# Allegro board usm-r1_20170105.brd
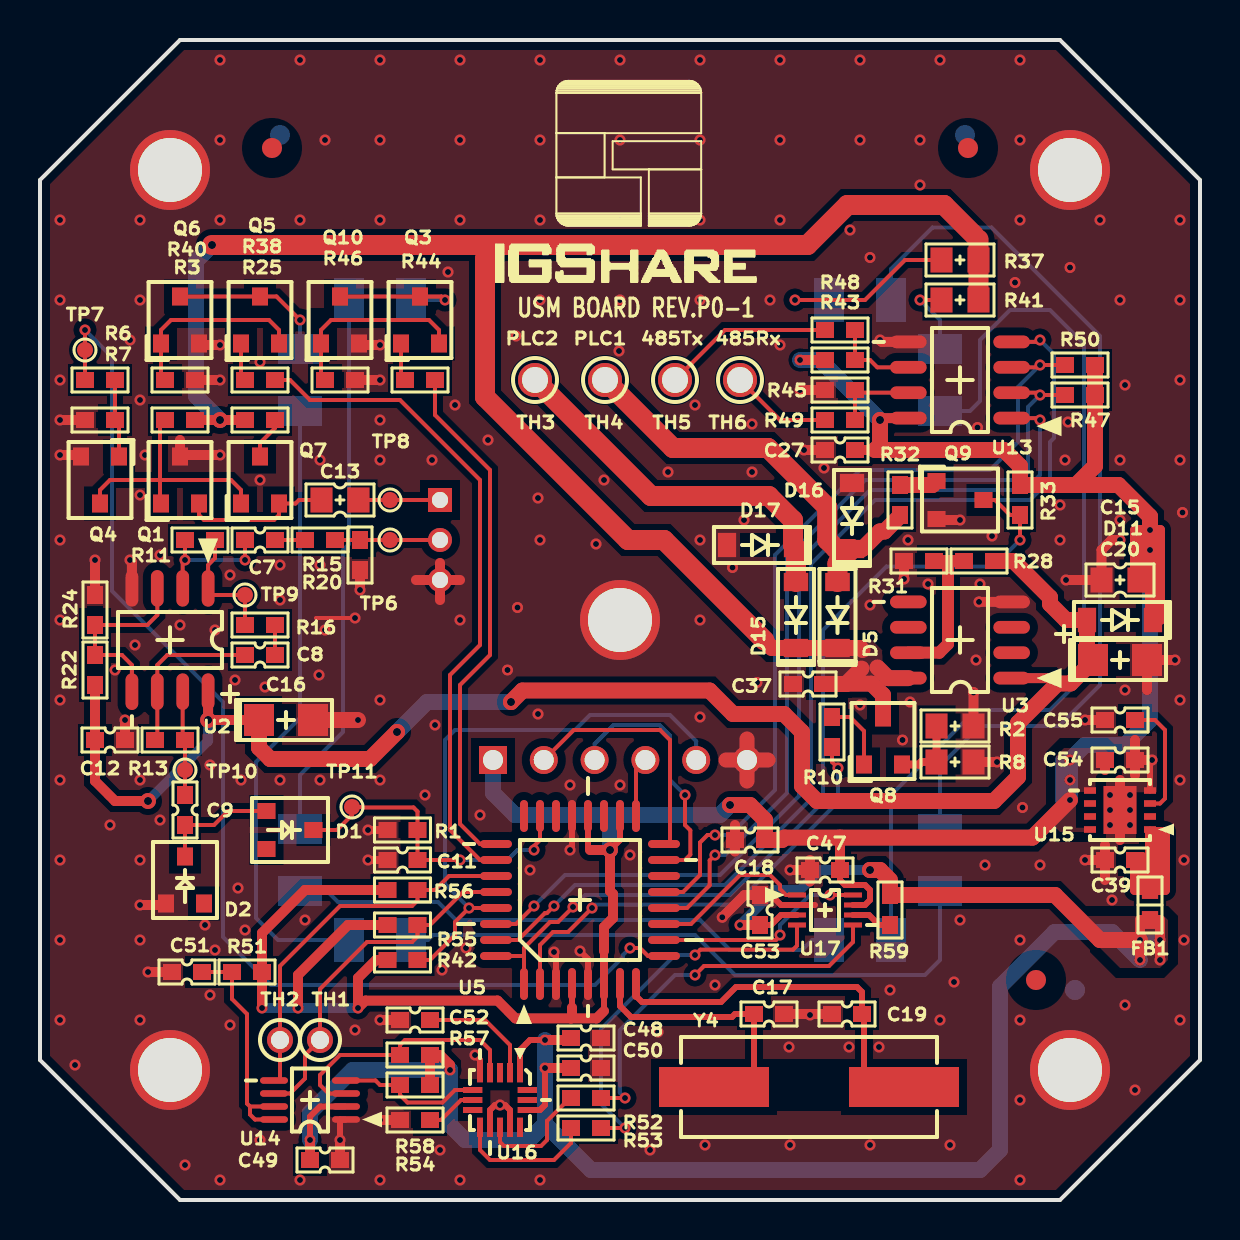
[diagram p0: board, top side]
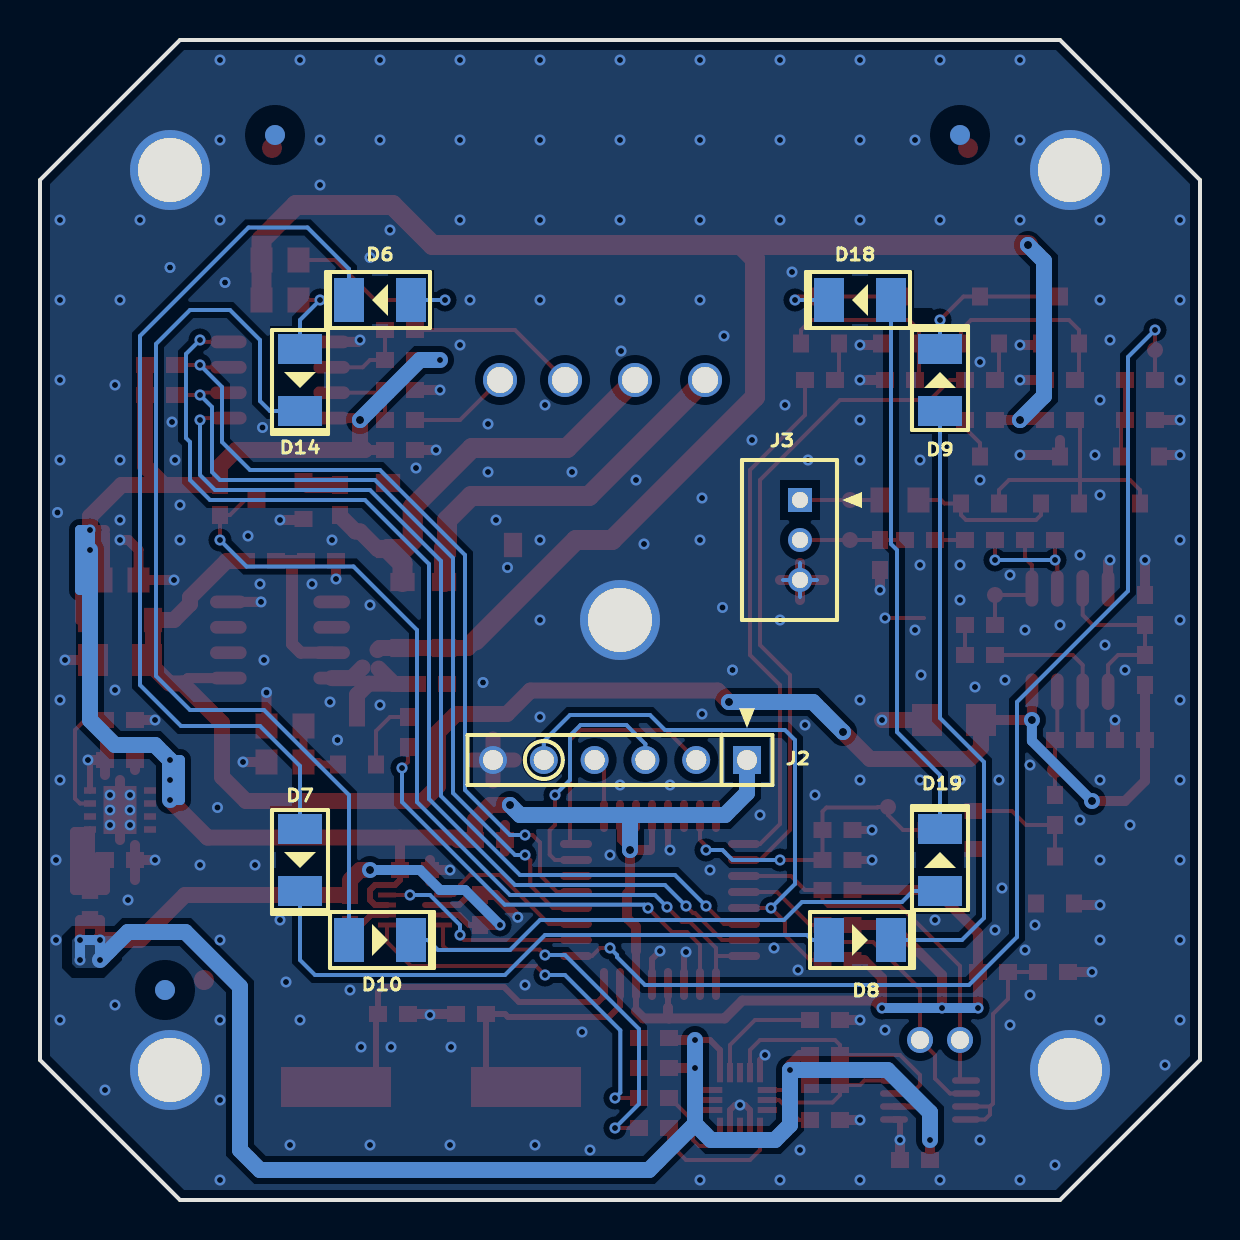
[diagram p1: board, bottom side, seen from below]

Outline 58 x 58 mm; copper layers: TOP, BOTTOM. Coordinates in mm from the lower left corner of the outline.
Outline path: 0,51 7,58 51,58 58,51 58,7 51,0 7,0 0,7 0,51

## Placement (name value [footprint] x y rotation side)
C7  -  [CC1608]  11 33 0 top
C8  -  [CC1608]  11 27.25 0 top
C9  -  [CC1608]  7.25 19.5 90 top
C11  -  [CC1608]  18.12 17 0 top
C12  -  [CC1608]  3.5 23 180 top
C13  -  [CC2012]  15 35 180 top
C15  -  [CC2012]  54 31 0 top
C16  -  [TC3216]  12.3 24 0 top
C17  -  [CC1608]  36.45 9.3 0 top
C18  -  [CC1608]  35.5 18 0 top
C19  -  [CC1608]  40.35 9.3 180 top
C20  -  [TC3216]  54 27 0 top
C27  -  [CC1608]  40 37.5 0 top
C37  -  [CC1608]  38.4 25.8 0 top
C39  -  [CC1608]  54 17 180 top
C47  -  [CC1608]  39.25 16.5 180 top
C48  -  [CC1608]  27.3 8.1 0 top
C49  -  [CC1608]  14.25 2 0 top
C50  -  [CC1608]  27.3 6.6 0 top
C51  -  [CC1608]  7.35 11.4 180 top
C52  -  [CC1608]  18.75 9 180 top
C53  -  [CC1608]  36 14.5 90 top
C54  -  [CC1608]  54 22 0 top
C55  -  [CC1608]  54 24 180 top
D1  -  [BAT54]  12.5 18.5 270 top
D2  -  [BAT54]  7.25 16 0 top
D5  -  [SOD-123]  39.88 29.25 270 top
D6  -  [JSL-3528]  41 45 0 bottom
D7  -  [JSL-3528]  45 17 270 bottom
D8  -  [JSL-3528]  17 13 180 bottom
D9  -  [JSL-3528]  13 41 90 bottom
D10  -  [JSL-3528]  41 13 180 bottom
D11  -  [SOD-123]  54 29 0 top
D14  -  [JSL-3528]  45 41 270 bottom
D15  -  [SOD-123]  37.8 29.25 270 top
D16  -  [SOD-123]  40.6 34.2 270 top
D17  -  [SOD-123]  36 32.75 0 top
D18  -  [JSL-3528]  17 45 0 bottom
D19  -  [JSL-3528]  13 17 90 bottom
FB1  -  [BEAD1608]  55.5 14.75 270 top
H1  -  [HOLE3_2]  6.5 51.5 0 top
H2  -  [HOLE3_2]  51.5 51.5 0 top
H3  -  [HOLE3_2]  6.5 6.5 0 top
H4  -  [HOLE3_2]  51.5 6.5 0 top
H5  -  [HOLE3_2]  29 29 0 top
J2  -  [HEADER6_2_5MM_S]  29 22 0 bottom
J3  -  [A2001-WV03]  20 33 90 bottom
NOREF  -  []  0 7 0 top
NOREF#2  -  []  7 0 90 top
NOREF#3  -  []  70.4 -15.8 0 top
NOREF#4  -  []  79 7.8 0 top
NOREF#5  -  [unnamed#2]  49.8 11 0 top
NOREF#6  -  [unnamed#2]  46.4 52.6 0 top
NOREF#7  -  []  0 0 0 top
NOREF#8  -  [unnamed#2]  11.6 52.6 0 top
NOREF#9  -  [unnamed#2]  12 53.25 180 bottom
NOREF#10  -  [unnamed#2]  51.75 10.5 180 bottom
NOREF#11  -  [unnamed#2]  46.25 53.25 180 bottom
Q1  -  [SOT23]  7 36 0 top
Q3  -  [SOT23]  19 44 0 top
Q4  -  [SOT23]  3 36 180 top
Q5  -  [SOT23]  11 44 0 top
Q6  -  [SOT23]  7 44 0 top
Q7  -  [SOT23]  11 36 0 top
Q8  -  [SOT23]  42.15 22.95 0 top
Q9  -  [SOT23]  46 35 270 top
Q10  -  [SOT23]  15 44 0 top
R1  -  [RC1608]  18.12 18.5 0 top
R2  -  [RC2012]  45.75 23.7 180 top
R3  -  [RC1608]  7 39 0 top
R6  -  [RC1608]  3 41 0 top
R7  -  [RC1608]  3 39 0 top
R8  -  [RC2012]  45.75 21.9 180 top
R10  -  [RC1608]  39.6 23.4 270 top
R11  -  [RC1608]  8 33 0 top
R13  -  [RC1608]  6.5 23 0 top
R15  -  [RC1608]  14 33 180 top
R16  -  [RC1608]  11 28.75 0 top
R20  -  [RC1608]  16 32.25 90 top
R22  -  [RC1608]  2.75 26.5 90 top
R24  -  [RC1608]  2.75 29.5 270 top
R25  -  [RC1608]  11 39 180 top
R28  -  [RC1608]  46.95 31.95 0 top
R31  -  [RC1608]  43.95 31.95 0 top
R32  -  [RC1608]  43 35 90 top
R33  -  [RC1608]  49 35 90 top
R37  -  [RC2012]  46 47 0 top
R38  -  [RC1608]  11 41 180 top
R40  -  [RC1608]  7 41 180 top
R41  -  [RC2012]  46 45 0 top
R42  -  [RC1608]  18.12 12 180 top
R43  -  [RC1608]  40 42 180 top
R44  -  [RC1608]  19 41 180 top
R45  -  [RC1608]  40 40.5 0 top
R46  -  [RC1608]  15 41 180 top
R47  -  [RC1608]  52 40.25 0 top
R48  -  [RC1608]  40 43.5 0 top
R49  -  [RC1608]  40 39 0 top
R50  -  [RC1608]  52 41.75 0 top
R51  -  [RC1608]  10.35 11.4 0 top
R52  -  [RC1608]  27.3 5.1 180 top
R53  -  [RC1608]  27.3 3.6 180 top
R54  -  [RC1608]  18.75 4 0 top
R55  -  [RC1608]  18.12 13.75 180 top
R56  -  [RC1608]  18.12 15.5 180 top
R57  -  [RC1608]  18.75 7.25 0 top
R58  -  [RC1608]  18.75 5.75 0 top
R59  -  [RC1608]  42.5 14.5 90 top
TH1  -  [1PIN-HDR]  14 8 0 top
TH2  -  [1PIN-HDR]  12 8 0 top
TH3  -  [TP1_3]  24.75 41 0 top
TH4  -  [TP1_3]  28.25 41 0 top
TH5  -  [TP1_3]  31.75 41 0 top
TH6  -  [TP1_3]  35 41 0 top
TP6  -  [TP]  17.5 33 0 top
TP7  -  [TP]  2.25 42.5 0 top
TP8  -  [TP]  17.5 35 0 top
TP9  -  [TP]  10.25 30.25 0 top
TP10  -  [TP]  7.25 21.5 0 top
TP11  -  [TP]  15.6 19.65 0 top
U2  -  [SOP8_3_9_6_1_27]  6.5 28 180 top
U3  -  [SOP8_3_9_6_1_27]  46 28 90 top
U5  -  [QFP32_7_9_0_8]  27 15 90 top
U13  -  [SOP8_3_9_6_1_27]  46 41 90 top
U14  -  [TSSOP8_2_8_4_0_65]  13.5 5 90 top
U15  -  [QFN8_3_0_65]  54 19.5 90 top
U16  -  [QFN16_3_0_5]  23 5 270 top
U17  -  [TSSOP8_2_3_3_1_0_5]  39.25 14.5 270 top
Y4  -  [SX-1]  38.45 5.65 0 top

## Library data of the parts
C7 = 200PF: alternate symbols: (B:CC1608_ALT)
C8 = 680PF: alternate symbols: (B:CC1608_ALT)
C9 = 1NF: alternate symbols: (B:CC1608_ALT)
C11 = 560PF: alternate symbols: (B:CC1608_ALT)
C12 C18 C27 C47-C49 C52-C55 = 100NF: alternate symbols: (B:CC1608_ALT)
C13 = 47NF: alternate symbols: (B:CC2012_ALT)
C15 C39 C51 = 2_2UF: alternate symbols: (B:CC2012_ALT;B:CC1608_ALT)
C16 C20 = TCSCS1C685MAAR: alternate symbols: (B:TC3216_ALT)
C17 C19 = 15PF: alternate symbols: (B:CC1608_ALT)
C37 = 680NF: alternate symbols: (B:CC1608_ALT)
C50 = 4_7UF: alternate symbols: (B:CC1608_ALT)
D1 D2 = BAT54: alternate symbols: (B:BAT54_ALT)
D5 D11 D15-D17 = MMSD4148T1G: alternate symbols: (B:SOD-123_ALT)
D6-D9 = JSL_3528URC: alternate symbols: (B:JSL-3528_ALT)
D10 D14 D18 D19 = JSL_3528PGC: alternate symbols: (B:JSL-3528_ALT)
FB1 = BLM18HE152SN1: alternate symbols: (B:BEAD1608_ALT)
H1-H5 = PCB_HOLE: alternate symbols: (B:HOLE3_2_ALT)
J2 = PH01_2_54_-SS40P-11_5MM: alternate symbols: (B:HEADER6_2_5MM_S_ALT)
J3 = A2001-WV03: alternate symbols: (B:A2001-WV03_ALT)
Q1 = MMBT3906: alternate symbols: (B:SOT23_ALT)
Q3-Q7 Q9 Q10 = MMBT3904: alternate symbols: (B:SOT23_ALT)
Q8 = ZXTN04120HF_SOT23F: alternate symbols: (B:SOT23_ALT)
R1 = 510K: alternate symbols: (B:RC1608_ALT)
R2 R8 = 15: alternate symbols: (B:RC2012_ALT)
R3 R33 = 47K: alternate symbols: (B:RC1608_ALT)
R6 R7 R15 R16 R22 R24 R42 = 10K: alternate symbols: (B:RC1608_ALT)
R10 = 1K: alternate symbols: (B:RC1608_ALT)
R11 R13 = 1M: alternate symbols: (B:RC1608_ALT)
R20 = 3_9K: alternate symbols: (B:RC1608_ALT)
R25 = 200: alternate symbols: (B:RC1608_ALT)
R28 = 360K: alternate symbols: (B:RC1608_ALT)
R31 R32 = 100K: alternate symbols: (B:RC1608_ALT)
R37 R41 = 3_3K: alternate symbols: (B:RC2012_ALT)
R38 R44 = 2_7K: alternate symbols: (B:RC1608_ALT)
R40 R46 = 3K: alternate symbols: (B:RC1608_ALT)
R43 R45 R47 R50 R54-R59 = 4_7K: alternate symbols: (B:RC1608_ALT)
R48 R49 = 10: alternate symbols: (B:RC1608_ALT)
R51 = 200K: alternate symbols: (B:RC1608_ALT)
R52 R53 = 0: alternate symbols: (B:RC1608_ALT)
TH1-TH6 = TH: alternate symbols: (B:TP1_3_ALT;B:1PIN-HDR_ALT)
TP6-TP11 = B+: alternate symbols: (B:TP_ALT)
U2 = TL072ID: alternate symbols: (B:SOP8_3_9_6_1_27_ALT)
U3 = LP2951D: alternate symbols: (B:SOP8_3_9_6_1_27_ALT)
U5 = ATMEGA48V-10AU: alternate symbols: (B:QFP32_7_9_0_8_ALT)
U13 = SN65176BD_DNI: alternate symbols: (B:SOP8_3_9_6_1_27_ALT)
U14 = PCA9306: alternate symbols: (B:TSSOP8_2_8_4_0_65_ALT)
U15 = TPS73533QDRBRQ1: alternate symbols: (B:QFN8_3_0_65_ALT)
U16 = MMA8451Q: alternate symbols: (B:QFN16_3_0_5_ALT)
U17 = TXS0102-Q1: alternate symbols: (B:TSSOP8_2_3_3_1_0_5_ALT)
Y4 = SX-1_8MHZ_: alternate symbols: (B:SX-1_ALT)

## Footprints (pads in the part's own frame, mm; a bottom-side part is the same pattern mirrored in y, then rotated)
1PIN-HDR
  round 1.3 hole 0.9: 1(0,0)
A2001-WV03
  rect 1.2x1.2 hole 0.8: 1(2,0)
  round 1.2 hole 0.8: 2(0,0) 3(-2,0)
BAT54
  rect 0.8x0.9 smd: 1(0,1.175) 2(-0.95,-1.175) 3(0.95,-1.175)
BEAD1608
  rect 0.889x0.813 smd: 1(-0.75,0) 2(0.75,0)
CC1608
  rect 0.9x0.8 smd: 1(-0.75,0) 2(0.75,0)
CC2012
  rect 1.1x1.25 smd: 1(-0.925,0) 2(0.925,0)
HEADER6_2_5MM_S
  rect 1.4x1.4 hole 1: 1(-6.35,0)
  round 1.4 hole 1: 2(-3.81,0) 3(-1.27,0) 4(1.27,0) 5(3.81,0) 6(6.35,0)
HOLE3_2
  round 4 hole 3.2: 1(0,0)
JSL-3528
  rect 1.5x2.2 smd: 1(-1.55,0) 2(1.55,0)
QFN8_3_0_65
  rect 0.325x0.6 smd: 1(-0.975,-1.5) 2(-0.325,-1.5) 3(0.325,-1.5) 4(0.975,-1.5) 5(0.975,1.5) 6(0.325,1.5) 7(-0.325,1.5) 8(-0.975,1.5)
  rect 2.4x1.65 smd: 9(0,0)
QFN16_3_0_5
  rect 0.967x0.3 smd: 1(-1.367,1) 2(-1.367,0.5) 3(-1.367,0) 4(-1.367,-0.5) 5(-1.367,-1) 9(1.367,-1) 10(1.367,-0.5) 11(1.367,0) 12(1.367,0.5) 13(1.367,1)
  rect 0.3x0.967 smd: 6(-0.5,-1.367) 7(0,-1.367) 8(0.5,-1.367) 14(0.5,1.367) 15(0,1.367) 16(-0.5,1.367)
QFP32_7_9_0_8
  oval 1.6x0.4 smd: 1(-4.2,2.8) 2(-4.2,2) 3(-4.2,1.2) 4(-4.2,0.4) 5(-4.2,-0.4) 6(-4.2,-1.2) 7(-4.2,-2) 8(-4.2,-2.8) 17(4.2,-2.8) 18(4.2,-2) 19(4.2,-1.2) 20(4.2,-0.4) 21(4.2,0.4) 22(4.2,1.2) 23(4.2,2) 24(4.2,2.8)
  oval 0.4x1.6 smd: 9(-2.8,-4.2) 10(-2,-4.2) 11(-1.2,-4.2) 12(-0.4,-4.2) 13(0.4,-4.2) 14(1.2,-4.2) 15(2,-4.2) 16(2.8,-4.2) 25(2.8,4.2) 26(2,4.2) 27(1.2,4.2) 28(0.4,4.2) 29(-0.4,4.2) 30(-1.2,4.2) 31(-2,4.2) 32(-2.8,4.2)
RC1608
  rect 0.9x0.8 smd: 1(-0.75,0) 2(0.75,0)
RC2012
  rect 1.1x1.25 smd: 1(-0.925,0) 2(0.925,0)
SOD-123
  rect 0.91x1.22 smd: 1(1.65,0) 2(-1.65,0)
SOP8_3_9_6_1_27
  oval 0.635x1.829 smd: 1(-1.905,-2.583) 2(-0.635,-2.583) 3(0.635,-2.583) 4(1.905,-2.583) 5(1.905,2.583) 6(0.635,2.583) 7(-0.635,2.583) 8(-1.905,2.583)
SOT23
  rect 0.8x0.9 smd: 1(-0.95,-1.175) 2(0.95,-1.175) 3(0,1.175)
SX-1
  rect 5.5x2 smd: 1(-4.75,0) 2(4.75,0)
TC3216
  rect 1.5x1.6 smd: 1(-1.35,0) 2(1.35,0)
TP
  round 0.8 smd: 1(0,0)
TP1_3
  round 1.7 hole 1.3: 1(0,0)
TSSOP8_2_3_3_1_0_5
  rect 0.25x0.9 smd: 1(-0.75,-1.4) 2(-0.25,-1.4) 3(0.25,-1.4) 4(0.75,-1.4) 5(0.75,1.4) 6(0.25,1.4) 7(-0.25,1.4) 8(-0.75,1.4)
TSSOP8_2_8_4_0_65
  oval 0.325x1.4 smd: 1(-0.975,-1.8) 2(-0.325,-1.8) 3(0.325,-1.8) 4(0.975,-1.8) 5(0.975,1.8) 6(0.325,1.8) 7(-0.325,1.8) 8(-0.975,1.8)
unnamed#2
  round 1 smd: (0,0)

## Nets
A5.5V: C12.2 C16.1 C20.1 D11.2 R22.1 R28.2 U2.8 U3.1
A24V: C37.2 D5.1 D15.1 Q8.3 R3.2 R25.2 R37.2 R41.2 U3.8
D3V3P: C48.1 C49.1 C50.1 C53.1 FB1.2 R57.2 R58.2 R59.2 U14.2 U16.1 U16.14 U17.3
D4.9V: C15.2 C18.2 C27.2 C47.1 C54.1 D11.1 J2.1 R33.2 R42.2 R43.2 R47.2 R50.2 R51.2 R55.2 R56.2 U5.4 U5.6 U5.18 U5.20 U13.8 U15.5 U15.8 U17.7
GND: C11.1 C12.1 C15.1 C16.2 C17.2 C18.1 C19.2 C20.2 C27.1 C37.1 C39.2 C47.2 C48.2 C49.2 C50.2 C51.2 C52.2 C53.2 C54.2 C55.2 D2.2 D16.2 D17.2 H1.1 H2.1 H3.1 H4.1 H5.1 J2.6 J3.3 Q1.3 Q4.2 Q6.2 Q9.2 Q10.2 R1.1 R2.1 R7.1 R8.1 R20.1 R24.1 R31.1 R40.1 R45.1 R46.1 R54.1 U2.4 U3.4 U5.3 U5.5 U5.21 U13.5 U14.1 U15.4 U15.9 U16.5 U16.10 U16.12 U17.2
485_DE_EN: R50.1 U5.13 U13.3
485_RE_EN: R47.1 U5.12 U13.2
485_RX: R49.1 TH6.1
485_RXD: U5.30 U13.1
485_TX: R48.1 TH5.1
485_TXD: U5.31 U13.4
I2C_SCL: R55.1 TH1.1 U5.28 U14.6
I2C_SDA: R56.1 TH2.1 U5.27 U14.5
INT1: R52.1 U17.5
INT1_M: U5.10 U17.8
INT2: R53.1 U17.4
INT2_M: U5.11 U17.1
LED_GREEN: R44.1 U5.25
LED_RED: R38.1 U5.26
PLC1: D5.2 D16.1 R32.1 TH4.1
PLC2: D15.2 D17.1 TH3.1
PLC_RX: Q9.3 R33.1 U5.1 U5.32
PLC_TX: R10.2 U5.2
RESET: J2.5 R42.1 U5.29
RX_ADC: C11.2 D1.1 R1.2 TP11.1 U5.23
RX_IN: J3.2 R15.1 R20.2 TP6.1
SCL: R57.1 U14.3 U16.4
SDA: R58.1 U14.4 U16.6
TX_OUT: C13.1 J3.1 TP8.1
TX_TRIG: R6.1 TP7.1 U5.9
N00306: C55.1 U15.3
N00430: Q8.1 R10.1
N00485: Q8.2 R2.2 R8.2
N00560: C39.1 FB1.1 U15.1
N00808: C51.1 R51.1 U14.7 U14.8
N00882: R28.1 R31.2 U3.7
N16711905: Q9.1 R32.2
N16712688: R43.1 R48.2 U13.6
N16712703: R45.2 R49.2 U13.7
N16713814: J2.4 U5.17
N16714029: J2.3 U5.15
N16714271: C19.1 U5.8 Y4.2
N16714295: C17.1 U5.7 Y4.1
N16714845: J2.2 U5.16
N16717763: R54.2 U16.7
N16718046: R53.2 U16.9
N16718070: R52.2 U16.11
N16718282: C52.1 U16.2
N16724355: R59.1 U17.6
N16777693: Q4.1 R6.2 R7.2
N16777717: Q1.1 Q4.3 Q7.1 R3.1
N16777760: C13.2 Q1.2 Q7.2
N16777979: C7.2 R15.2
N16777981: C7.1 R11.1 U2.2
N16778000: R22.2 R24.2 U2.3 U2.5
N16778063: C8.1 R13.1 U2.6
N16778096: R11.2 R16.1 TP9.1 U2.1
N16778098: C8.2 R16.2
N16778104: C9.2 R13.2 TP10.1 U2.7
N16778216: C9.1 D1.2 D2.1
N16779077: D9.2 Q5.3 Q6.3
N16779095: Q5.2 Q6.1 R40.2
N16779267: Q5.1 R38.2
N16779649: D18.2 Q3.3 Q10.3
N16779651: Q3.2 Q10.1 R46.2
N16779692: Q3.1 R44.2
N16779821: D14.1 R41.1
N16779835: D10.1 D14.2
N16779837: D10.2 D19.1
N16779852: D18.1 D19.2
N16779961: D6.1 R37.1
N16779980: D6.2 D7.1
N16779982: D7.2 D8.1
N16779984: D8.2 D9.1
N167777270: Q7.3 R25.1

Pads without a net: D1 3; D2 3; U3 2 3 5 6; U5 14 19 22 24; U15 2 6 7; U16 3 8 13 15 16

## Via types
v1: diameter 0.55, hole 0.3, TOP to BOTTOM, 289 vias
v2: diameter 0.8, hole 0.4, TOP to BOTTOM, 10 vias

## Routing (per net, layer and track width the routed paths; a pad name or vN(x,y) marks a point on that pad's centre or on a via; arc(x,y) is an arc through that point)
A5.5V: length 80.9
  TOP w0.5: v2(5.4,19.95) 3.75,19.95 2.75,20.95 C12.2 R22.1 ; 50.88,25.83 50.61,26.09 U3.1 ; U2.8 v2(8.4,24) C16.1
  TOP w0.8: C16.1 10.95,22.62 11.52,22.05 16.5,22.05 v2(17.85,23.4) ; v2(23.55,24.9) 24.12,25.47 33.48,25.47 34.65,24.3 37.2,24.3 38.1,23.4 38.1,20.7 38.85,19.95 47.7,19.95 48.9,21.15 48.9,23.85 50.88,25.83 51.53,25.83 52.65,26.95 C20.1 52.35,27.3 D11.2 51.3,29 50.5,29.8 50.5,30.13 48.68,31.95 R28.2
  BOTTOM w0.5: v2(8.4,24) 8.4,22.95 v2(5.4,19.95)
  BOTTOM w0.8: v2(23.55,24.9) 19.35,24.9 v2(17.85,23.4)
A24V: length 94.2
  TOP w0.5: R3.2 v2(9,39) R25.2
  TOP w0.8: 36.23,27.97 36.6,27.6 D15.1 D5.1 41.02,27.6 41.12,27.5 ; U3.8 42.41,26.09 41.88,26.62 ; Q8.3 42.15,25.25 41.58,25.82 40.32,25.82 ; 46.92,48.02 46.7,48.25 ; 40.32,25.82 41.07,26.57 ; 40.32,25.82 40.3,25.8 C37.2
  TOP w1: 22.95,47.75 v2(8.6,47.75) ; 22.95,47.75 38.38,47.75 40.38,49.75 45.2,49.75 46.7,48.25 ; 22.95,47.75 22.25,47.05 22.25,40.15 29.4,33 31.2,33 36.23,27.97 ; 46.92,48.02 R37.2 R41.2
  BOTTOM w0.8: v2(8.6,47.75) 7.8,46.95 7.8,40.2 v2(9,39)
D3V3P: length 111.9
  TOP w0.3: v1(25.25,6.6) 25.25,4.75 25,4.5 U16.14 ; C53.1 36.55,13.75 37.05,14.25 U17.3 ; U16.1 24,7.5 24.5,8 v1(25.25,8) ; U14.2 14,4.67 13.5,4.17 v1(13.5,3)
  TOP w0.5: v1(55,12) v1(55,13) 55,14 FB1.2 56,14 v1(56,13) v1(56,12) ; C49.1 v1(13.5,3) ; v1(20.5,6.5) 20.5,6.75 20,7.25 R57.2 R58.2 ; v1(35,13.75) C53.1 ; C48.1 26.35,8.1 26.25,8 v1(25.25,8) ; C50.1 v1(25.25,6.6) ; 42.5,16 42.4,16.1
  TOP w0.8: 42.4,16.1 42,16.5 v2(41.5,16.5) ; v1(55,13) 53,13 50.75,15.25 R59.2 42.5,16
  BOTTOM w0.5: v1(56,12) v1(56,13) v1(55,13) v1(55,12) ; v2(41.5,16.5) 39,16.5 38,15.5 36.75,15.5 v1(35,13.75)
  BOTTOM w0.8: 25.25,3.8 v1(25.25,6.6) v1(25.25,8) ; 25.25,3.8 24.45,3 21.25,3 20.5,3.75 v1(20.5,6.5) 15.62,6.5 13.5,4.38 v1(13.5,3) ; 25.25,3.8 27.55,1.5 47,1.5 48,2.5 48,10.67 50.73,13.4 53.6,13.4 v1(55,12)
D4.9V: length 167.2
  TOP w0.3: C47.1 40,16 40.25,15.75 41.25,15.75 41.5,15.5 41.5,15 41.25,14.75 U17.7 ; U5.18 29,18 v2(28.5,17.5) ; U5.4 26.6,9.62 ; 28.2,9.45 U5.6 ; 27.5,17.5 27.4,17.6 U5.20
  TOP w0.4: U5.6 28.2,12.45
  TOP w0.5: 55,33 55,31 ; 55,31 C15.2 54.75,31 54.75,33.3 ; 55,31 55.5,31 ; 55.5,31 v1(55.5,32.5) v1(55.5,33.5) ; 55.5,31 55.5,29 D11.1 56,29 56,33.5 v1(55.5,33.5) ; 53.25,21.5 C54.1 ; 26.6,9.62 26.6,9.13 26.55,9.08 ; 27.5,17.5 v2(28.5,17.5) 28.5,15.45 28.65,15.3 28.65,14.1 28.2,13.65 28.2,12.45 ; 41.75,37.5 C27.2 ; v1(55.5,33.5) 54.75,33.5 ; v1(12.9,9.6) 12.9,11.25 15.4,13.75 R55.2 ; R56.2 13.25,15.5 11.1,13.35 R51.2 v1(11.1,9.6) ; 40,18.12 C47.1 ; 26.55,9.08 27.83,9.08 28.2,9.45 ; 26.55,9.08 23.77,9.08 22.88,9.97 16.27,9.97 v1(15.9,9.6) 15.9,11.1 16.8,12 R42.2 ; v2(42,39) 42.09,39.09 U13.8 ; R43.2 v1(38,42)
  TOP w0.8: 51.8,35.75 52.75,36.7 R47.2 R50.2 ; 51.8,35.75 53.92,35.75 55.5,34.17 v1(55.5,33.5) ; 51.8,35.75 R33.2 49,36.7 48.2,37.5 41.75,37.5 42,37.75 v2(42,39) ; v2(34.5,19.75) 35.5,19.75 36.25,19 C18.2 37.1,18 37.22,18.12 49.62,18.12 v1(51.5,20) ; 55,33.05 55,33
  BOTTOM w0.5: v1(11.1,9.6) v1(12.9,9.6) v1(15.9,9.6) ; v1(51.5,22) 51,22 51,20 v1(51.5,20) ; 55.5,30.5 56,30.5 56,33.5 v1(55.5,33.5) v1(55.5,32.5)
  BOTTOM w0.8: 28.5,19.25 23.75,19.25 22.65,20.35 J2.1 ; 28.5,19.25 v2(28.5,17.5) ; 28.5,19.25 34,19.25 v2(34.5,19.75) ; v1(38,42) 39,42 v2(42,39) ; v1(55.5,32.5) 55.5,24 54.25,22.75 52.25,22.75 v1(51.5,22) v1(51.5,21) v1(51.5,20)
GND: length 91.8
  TOP w0.2: 13.8,29.1 v1(15.75,29.1) ; 38.5,17.08 38.5,17
  TOP w0.3: U5.21 26.6,17.6 v1(26.5,17.5) ; 55.5,22 U15.4 ; v1(15,3) 15,4.03 U14.1 ; v1(21.75,7.25) 22,7 U16.5 ; v1(25.7,12.4) 25.7,12.3 25.8,12.2 U5.3 ; U5.5 27.4,12.05 v1(27,12.45) ; C53.2 36.55,15.25 37.05,14.75 U17.2 38.75,14.75 ; U16.12 23.5,4.5 23.25,4.75 v1(23,4.75) 22.75,4.75 22.5,4.5 U16.10
  TOP w0.4: R1.1 v1(16.4,18.5) ; C11.1 v1(16.4,17)
  TOP w0.5: R7.1 v1(1,39) ; 18.8,31 J3.3 ; J3.3 20,31.85 ; J3.3 21,31 ; J3.3 20,30 ; C39.2 53.25,17.75 ; C39.2 v1(52.25,17) ; C39.2 53.25,16 ; R2.1 v1(46.67,25.38) ; C27.1 v1(38.2,37.5) ; v1(5,14.75) 6.3,14.75 D2.2 ; R45.1 v1(38,40.5) ; C19.2 38.55,9.3 v1(38.5,9.25) 38.45,9.3 C17.2 ; U15.9 v1(54.5,19.5) ; U15.9 54,20.25 ; U15.9 54,18.75 ; U15.9 v1(53.5,19.5) ; v1(46,34) 44.83,34 Q9.2 ; 54,18.75 v1(53.5,18.75) ; 54,18.75 54,18 ; 54,18.75 v1(54.5,18.75) ; C51.2 v1(5.4,11.4) ; v1(4.5,32) 4.59,31.91 U2.4 ; R54.1 v1(17,4) ; C52.2 v1(17,9) ; Q10.2 15.95,42.75 v1(17,42.75) ; C54.2 54.75,21.25 ; C54.2 54.75,23 ; C54.2 v1(55.6,22) ; v1(46.95,29.91) U3.4 ; R8.1 v1(47.85,21.9) ; v1(56.75,27) C20.2 55.35,25.5 ; C53.2 35.23,15.25 v1(34.11,14.14) ; 7,37.25 7,38 ; 7,37.25 Q1.3 ; 7,37.25 v1(9,37.25) ; Q6.2 7.95,42.75 v1(9,42.75) ; Q4.2 2.05,37.25 v1(1,37.25) ; 34.75,17.42 C18.1 34.75,18.75 ; R31.1 v1(43.2,31.05) ; C47.2 38.5,15.92 ; C47.2 v1(37.5,16.5) ; C47.2 38.5,17 ; v1(51.3,31) C15.1 53.08,32.5 53.58,33 v1(54,33) ; 54,20.25 v1(54.5,20.25) ; 54,20.25 54,21 ; 54,20.25 v1(53.5,20.25) ; v1(16,30.5) R20.1 ; v1(42,43) 42.09,42.91 U13.5 ; R46.1 v1(17,41) ; C49.2 v1(15,3) ; R24.1 v1(2.75,32) ; C12.1 v1(4.25,24) ; C55.2 v1(52.25,24) ; v1(9,41) R40.1
  TOP w0.75: J2.6 35.35,20.95 ; J2.6 35.35,23.05 ; J2.6 34.3,22 ; J2.6 36.4,22
  TOP w0.8: C16.2 v1(15.9,24)
  BOTTOM w0.2: J3.3 20.85,31 ; J3.3 19.15,31 ; J3.3 20,31.85 ; J3.3 20,30.15
  vias: v1(1,49) v1(1,45) v1(1,41) v1(1,33) v1(1,29) v1(1,25) v1(1,21) v1(1,17) v1(1,13) v1(1,9) v1(1.75,6.75) v1(3.5,18.75) v1(3.75,26.5) v1(4.5,43) v1(4.75,27.75) v1(5,49) v1(5,45) v1(5,40) v1(5,35.25) v1(5,21) v1(5,17) v1(5,13) v1(5,9) v1(5.25,37.25) v1(6,32.25) v1(6,19) v1(6.5,6.5) v1(7,28.75) v1(7.25,1.75) v1(8.25,13.75) v1(8.5,21.75) v1(8.5,10.25) v1(8.75,28.5) v1(8.75,12.5) v1(9,57) v1(9,53) v1(9,49) v1(9,1) v1(9.5,31.25) v1(9.5,8.75) v1(9.75,26) v1(9.9,15.6) v1(10.05,21) v1(10.25,13.5) v1(11,41.9) v1(11,36) v1(11,3) v1(11.25,25.65) v1(12,31.75) v1(12,30) v1(12,21) v1(13,57) v1(13,49) v1(13,1) v1(13.25,14) v1(13.95,26.25) v1(14,37) v1(14,31.75) v1(14,21) v1(14.25,53) v1(14.25,28.5) v1(15.75,8.5) v1(17,57) v1(17,53) v1(17,49) v1(17,39) v1(17,37) v1(17,25) v1(17,21) v1(17,1) v1(19.25,20.25) v1(19.6,37) v1(19.75,23.75) v1(20,2.5) v1(20.1,11.5) v1(20.4,46.4) v1(20.75,39.75) v1(21,57) v1(21,53) v1(21,49) v1(21,29) v1(21,1) v1(21.3,12.6) v1(22,19.25) v1(22.4,38) v1(23.38,26.5) v1(23.8,43.2) v1(23.88,29.62) v1(24.5,16.5) v1(24.9,35.1) v1(24.9,24.3) v1(25,57) v1(25,53) v1(25,49) v1(25,45) v1(25,33) v1(25,1) v1(26.5,20.75) v1(27.8,32.8) v1(28.2,36) v1(28.95,42.45) v1(29,57) v1(29,53) v1(29,49) v1(29,45) v1(29,20.75) v1(29.5,17.25) v1(30.5,2.5) v1(30.9,8.4) v1(31.4,36.4) v1(32.75,39.75) v1(33,57) v1(33,53) v1(33,49) v1(33,45) v1(33,33) v1(33,29) v1(33,24.15) v1(33.25,2.75) v1(33.75,10.75) v1(34.62,31.62) v1(35.2,34) v1(35.6,38.8) v1(35.6,36.4) v1(35.85,25.88) v1(36.5,45) v1(37,57) v1(37,53) v1(37,49) v1(37,42.75) v1(37.45,7.65) v1(37.5,2.75) v1(39.2,36.6) v1(40.5,48.5) v1(40.45,7.65) v1(41,57) v1(41,53) v1(41,24.75) v1(41.5,47.12) v1(41.5,29.75) v1(41.5,2.75) v1(41.95,7.65) v1(42.5,10.5) v1(43.12,23) v1(43.4,33) v1(43.5,24.9) v1(44,53) v1(44,50.75) v1(44.4,30.8) v1(45,57) v1(45,9) v1(45.5,2.75) v1(45.7,10.9) v1(46,14) v1(46.8,27) v1(46.88,38.62) v1(47,30.8) v1(47.25,16.75) v1(47.6,33.2) v1(48.75,45.88) v1(49,57) v1(49,53) v1(49,49) v1(49,13) v1(49,9) v1(49,5) v1(49,1) v1(49.12,19.62) v1(50,16.75) v1(51,34.75) v1(51,33) v1(51.25,37) v1(51.4,38.9) v1(51.5,46.62) v1(53,49) v1(53.6,15) v1(54,45) v1(54,37) v1(54,34) v1(54.25,40.75) v1(54.25,25.5) v1(54.25,9.75) v1(54.75,5.5) v1(57,49) v1(57,45) v1(57,41) v1(57,37) v1(57,25) v1(57,21) v1(57,9) v1(57.12,34.38) v1(57.2,17) v1(57.2,13)
485_DE_EN: length 41.9
  TOP w0.2: R50.1 v1(50,41.75) 49.88,41.63 U13.3 ; U5.13 32.15,15.4 33,16.25 33,17.88 33.38,18.25 v1(33.75,18.25)
  BOTTOM w0.2: v1(33.75,18.25) 34.5,18.25 36.75,20.5 36.75,32.25 41,36.5 47.5,36.5 48.9,37.9 48.9,40.65 v1(50,41.75)
485_RE_EN: length 41.7
  TOP w0.2: R47.1 v1(50,40.25) 49.88,40.37 U13.2 ; v1(33.75,17.25) 33.48,16.98 33.48,15.73 32.35,14.6 U5.12
  BOTTOM w0.2: v1(50,40.25) 49.4,39.65 49.4,36.4 49,36 41.25,36 37.35,32.1 37.35,20.35 34.25,17.25 v1(33.75,17.25)
485_RX: length 5.1
  TOP w0.2: TH6.1 37,39 R49.1
485_RXD: length 47.6
  TOP w0.2: v1(24.7,14.7) 23.8,13.8 U5.30 ; v1(50,39) 50,39.09 U13.1
  BOTTOM w0.2: v1(50,39) 50,36.25 49.25,35.5 41.5,35.5 37.95,31.95 37.95,20.2 34,16.25 26.25,16.25 v1(24.7,14.7)
485_TX: length 8.5
  TOP w0.2: TH5.1 34.25,43.5 R48.1
485_TXD: length 52.9
  TOP w0.2: U13.4 49.91,42.91 v1(50,43) ; U5.31 23.9,13 25.25,14.35 25.34,14.35 v1(25.7,14.7)
  BOTTOM w0.2: v1(50,43) 50.7,42.3 50.7,38.1 50.5,37.9 50.5,36 49.5,35 41.75,35 38.55,31.8 38.55,20.05 34.25,15.75 26.75,15.75 v1(25.7,14.7)
I2C_SCL: length 17.8
  TOP w0.2: U14.6 12.5,5.33 13.25,6.08 13.25,7.25 TH1.1 14,10.55 16.35,12.9 18.6,12.9 18.88,13.18 R55.1 19.5,13.75 21.15,15.4 U5.28
I2C_SDA: length 19
  TOP w0.2: U14.5 12,5.97 TH2.1 12,11.7 15,14.7 18.6,14.7 18.88,14.97 R56.1 19.75,15.5 20.45,16.2 U5.27
INT1: length 19
  TOP w0.2: v1(32.75,11.25) 33.2,11.7 39.45,11.7 40.65,12.9 U17.5 ; v1(29.25,5.1) R52.1
  BOTTOM w0.2: v1(29.25,5.1) 28.98,5.37 28.98,8.48 31.75,11.25 v1(32.75,11.25)
INT1_M: length 10.7
  TOP w0.2: v1(39.5,15.25) U17.8 ; U5.10 36.8,13 37,13.2 v1(37,13.25)
  BOTTOM w0.2: v1(39.5,15.25) 38.5,15.25 37,13.75 v1(37,13.25)
INT2: length 19.2
  TOP w0.2: v1(32.75,12.25) 33.02,12.52 37.65,12.52 37.85,12.72 U17.4 ; R53.1 v1(29.25,3.6)
  BOTTOM w0.2: v1(32.75,12.25) 31.75,12.25 28.05,8.55 28.05,4.8 v1(29.25,3.6)
INT2_M: length 8.2
  TOP w0.2: U5.11 32.55,13.8 35,16.25 36.5,16.25 37,15.75 37,15.55 37.3,15.25 U17.1
LED_GREEN: length 26.2
  TOP w0.2: U5.25 22,17.8 21,18.8 21,25.75 22.5,27.25 22.5,36.5 19.75,39.25 R44.1
LED_RED: length 33.4
  TOP w0.2: U5.26 22,17 20.5,18.5 20.5,26.25 22,27.75 22,36 18,40 13.5,40 12.5,41 R38.1
PLC1: length 21.9
  TOP w0.8: D16.1 41.12,32.55 41.99,33.43 42.23,33.43 43,34.2 R32.1
  TOP w1: D5.2 39.88,31.82 D16.1 39.81,32.55 39.36,33 39.36,34.64 36.4,37.6 31.65,37.6 TH4.1
PLC2: length 19
  TOP w1: D15.2 37.8,32.6 D17.1 37.65,33.99 36.44,35.2 30.55,35.2 TH3.1
PLC_RX: length 44.9
  TOP w0.2: U5.1 24.2,12.2 ; 24.2,12.2 24.2,12.6 25.5,13.9 25.9,13.9 v1(26.65,14.65) ; 24.2,12.2 U5.32 ; v1(49,33) R33.1 48.5,34.25 47.75,35 Q9.3
  BOTTOM w0.2: v1(26.65,14.65) 27.25,15.25 34.5,15.25 39.15,19.9 39.15,28.5 42.32,31.67 47.67,31.67 v1(49,33)
PLC_TX: length 22.7
  TOP w0.2: v1(39.9,21.6) 39.6,21.9 R10.2 ; v1(27.6,14.6) 26.4,13.4 25.65,13.4 25,12.75 U5.2
  BOTTOM w0.2: v1(39.9,21.6) 39.9,19.9 34.77,14.77 27.77,14.77 v1(27.6,14.6)
RESET: length 28.8
  TOP w0.2: R42.1 19.5,12 20.75,13.25 20.75,13.9 v1(21.45,14.6) U5.29
  BOTTOM w0.2: J2.5 32.81,22.94 31.5,24.25 27.5,24.25 26.75,23.5 20.75,23.5 20.25,23 20.25,15.8 v1(21.45,14.6)
RX_ADC: length 16.3
  TOP w0.2: D1.1 14.85,18.5 15.6,19.25 TP11.1 16.1,19.65 16.12,19.62 18.68,19.62 18.88,19.43 R1.2 C11.2 v1(21,17) ; v1(24.7,17.5) 24.7,17.7 25,18 U5.23
  BOTTOM w0.2: v1(24.7,17.5) 23.88,17.5 23.38,17 v1(21,17)
RX_IN: length 5.2
  TOP w0.2: R15.1 R20.2 TP6.1 J3.2
SCL: length 12.8
  TOP w0.2: U14.3 14.43,5.33 14,5.75 14,6.25 15,7.25 R57.1 18,7.75 18.25,8 22,8 22.5,7.5 U16.4
SDA: length 7.3
  TOP w0.2: U16.6 20.75,5.5 20.12,4.88 18.38,4.88 18,5.25 R58.1 17,5.75 16.77,5.97 U14.4
TX_OUT: length 4.1
  TOP w0.2: C13.1 TP8.1 J3.1
TX_TRIG: length 59.7
  TOP w0.2: v1(29.5,12.6) 30,12.6 30.4,12.2 U5.9 ; R6.1 TP7.1 v1(2.25,43.5)
  BOTTOM w0.2: v1(2.25,43.5) 3.6,42.15 3.6,30.45 9.15,24.9 9.15,13.15 11.55,10.75 27.75,10.75 29.14,12.14 29.14,12.24 v1(29.5,12.6)
N00306: length 6
  TOP w0.2: C55.1 55.75,24 56.25,23.5 56.25,20.07 56,19.82 U15.3
N00430: length 3.6
  TOP w0.2: R10.1 40.5,24.15 41.2,23.45 Q8.1
N00485: length 3.6
  TOP w0.4: R2.2 R8.2 44.08,21.9 43.95,21.77 Q8.2
N00560: length 15.1
  TOP w0.3: 55.5,18.4 U15.1
  TOP w0.5: FB1.1 55.5,17.12 ; FB1.1 55.12,15.5 ; FB1.1 55.75,15.5 ; 55.5,17.12 55.12,17.12 ; 55.5,17.12 55.5,18.4 55.75,18.4 ; 55.75,18.4 55.75,15.5 ; 55.75,18.4 56.25,18.4 56.25,15.5 55.75,15.5 ; 55.12,15.5 54.75,15.5 C39.1 54.75,17.12 55.12,17.12 ; 55.12,15.5 55.12,17.12
N00808: length 11.5
  TOP w0.2: C51.1 R51.1 9.6,10.05 10.35,9.3 10.35,4.83 10.5,4.67 ; 10.5,4.67 U14.7 ; 10.5,4.67 10.5,4.28 10.75,4.03 U14.8
N00882: length 7.8
  TOP w0.6: 45.4,31.95 R28.1 ; 45.4,31.95 45.4,27.8 44.97,27.36 U3.7 ; 45.4,31.95 R31.2
N16711905: length 1.9
  TOP w0.8: R32.2 44.62,35.75 Q9.1
N16712688: length 4.3
  TOP w0.2: R48.2 R43.1 41.5,42 41.87,41.63 U13.6
N16712703: length 4.2
  TOP w0.2: R45.2 40.75,40.37 ; 40.75,40.37 U13.7 ; 40.75,40.37 R49.2
N16713814: length 3
  TOP w0.2: U5.17 29.8,21.53 J2.4
N16714029: length 13
  TOP w0.2: v1(32.25,20.25) 32.25,18.75 32.52,18.48 32.52,17.27 32.25,17 U5.15
  BOTTOM w0.2: v1(32.25,20.25) 31.5,21 31.5,23.22 30.97,23.75 28.68,23.75 27.73,22.8 J2.3
N16714271: length 19.2
  TOP w0.3: U5.8 29.8,10.2 30.1,9.9 34.05,9.9 34.8,10.65 40.85,10.65 41.1,10.4 C19.1 41.2,9.2 41.2,5.65 Y4.2
N16714295: length 13.7
  TOP w0.3: U5.7 29,9.7 29.55,9.15 34.6,9.15 34.75,9.3 C17.1 35.7,5.65 Y4.1
N16714845: length 12.6
  TOP w0.2: J2.2 26.69,23.5 31,23.5 31.5,23 31.5,17.8 U5.16
N16717763: length 2.5
  TOP w0.2: U16.7 21.05,5 20.05,4 R54.2
N16718046: length 7
  TOP w0.2: U16.9 22,2.5 22.5,2 25.7,2 26.55,2.85 R53.2
N16718070: length 5.9
  TOP w0.2: R52.2 26.5,5.1 25.35,3.95 25.35,3 25.05,2.7 23.2,2.7 23,2.9 U16.11
N16718282: length 5.9
  TOP w0.2: C52.1 22.25,9 23.5,7.75 U16.2
N16724355: length 2.1
  TOP w0.3: U17.6 41.45,14.25 41.95,13.75 R59.1
N16777693: length 4
  TOP w0.2: R6.2 R7.2 3.95,39 Q4.1
N16777717: length 13.3
  TOP w0.2: 6,36 6,39 R3.1 ; 6,36 3.5,36 3,35.5 Q4.3 ; 6,36 6,34.83 Q1.1 ; 6,36 9.55,36 10.05,35.5 Q7.1
N16777760: length 7.6
  TOP w0.2: Q1.2 7.95,34.25 8.2,34 11.7,34 11.95,34.25 Q7.2 12.78,34.83 12.95,35 C13.2
N16777979: length 1.5
  TOP w0.2: C7.2 R15.2
N16777981: length 6.5
  TOP w0.2: R11.1 v1(7.25,32) 7.13,31.89 U2.2 ; C7.1 v1(10.25,32)
  BOTTOM w0.2: v1(10.25,32) v1(7.25,32)
N16778000: length 9.5
  TOP w0.2: U2.5 4.59,26.75 4.09,27.25 R22.2 R24.2 5.37,28.75 5.87,29.25 U2.3
N16778063: length 8.5
  TOP w0.2: C8.1 6.37,27.25 5.87,26.75 U2.6 5.87,23 R13.1
N16778096: length 6.2
  TOP w0.2: R16.1 TP9.1 8.4,30.25 U2.1 8.4,31.75 8.75,32.09 R11.2
N16778098: length 1.5
  TOP w0.2: C8.2 R16.2
N16778104: length 5.3
  TOP w0.2: C9.2 TP10.1 R13.2 7.13,23 U2.7
N16778216: length 5.9
  TOP w0.2: D2.1 C9.1 8.7,18.75 9.4,19.45 D1.2
N16779077: length 7.9
  TOP w0.2: Q6.3 Q5.3 11.82,45.17 v1(13,44)
  BOTTOM w0.2: D9.2 v1(13,44)
N16779095: length 9.7
  TOP w0.2: R40.2 6.05,41 Q6.1 6.05,43.5 6.55,44 11.45,44 11.95,43.5 Q5.2
N16779267: length 2
  TOP w0.2: Q5.1 10.05,41 R38.2
N16779649: length 7
  TOP w0.2: Q10.3 Q3.3 20.07,45.17 v1(20.25,45)
  BOTTOM w0.2: D18.2 v1(20.25,45)
N16779651: length 9.7
  TOP w0.2: Q3.2 19.95,43.5 19.45,44 14.55,44 14.05,43.5 Q10.1 14.05,41 R46.2
N16779692: length 2
  TOP w0.2: Q3.1 18.05,41 R44.2
N16779821: length 3.9
  TOP w0.2: R41.1 v1(44,45)
  BOTTOM w0.2: v1(44,45) 45,44 D14.1
N16779835: length 47.7
  BOTTOM w0.2: D14.2 46.5,39.45 47,39.95 47,43 48.5,44.5 50.5,44.5 52.2,42.8 52.2,26.2 50.5,24.5 46.8,24.5 42.55,20.25 D10.1
N16779837: length 27.9
  BOTTOM w0.2: D10.2 38.6,13 38.1,12.5 34.5,12.5 33,14 20.8,14 19.9,14.9 14.9,14.9 14.35,15.45 D19.1
N16779852: length 27.5
  BOTTOM w0.2: D18.1 15.45,32.8 15.15,32.5 15.15,23.4 13,21.25 D19.2
N16779961: length 9.9
  TOP w0.2: v1(37.75,45) 41.25,45 43.25,47 R37.1
  BOTTOM w0.2: D6.1 v1(37.75,45)
N16779980: length 45.4
  BOTTOM w0.2: D7.1 45,21.7 47,23.7 50.95,23.7 53,25.75 53,43.2 47.58,48.62 44.62,48.62 42.55,46.55 D6.2
N16779982: length 31.1
  BOTTOM w0.2: D8.1 19.4,13 19.65,13.25 32.75,13.25 34.75,11.25 44.25,11.25 45,12 D7.2
N16779984: length 31.4
  BOTTOM w0.2: D8.2 11.9,13 10.8,14.1 10.8,21.9 13,24.1 D9.1
N167777270: length 2.1
  TOP w0.2: R25.1 11.75,38.6 11,37.85 Q7.3

## Copper pours and planes (outline as drawn; the poured copper is in the pictures)
A24V on TOP: 42.12,26.32 42.12,27.48 41.6,28 40,28 39.6,27.6 39,27.6 38.8,27.4 38.8,25.8 41.6,25.8
D3V3P on TOP: 53,12.8 53,12.6 54,11.6 56,11.6 56.4,12 56.4,14 56.2,14.2 52.2,14.2 52.2,13.6
D3V3P on BOTTOM: 54.4,12.4 54.4,12.2 55,11.6 56.2,11.6 56.4,11.8 56.4,13 56.2,13.2 54.2,13.2 54.2,12.6
D4.9V on TOP: 50.8,22.2 50.8,18.6 51,18.4 52.8,18.4 52.8,18.8 52,18.8 52,20.4 52.8,20.4 52.8,21.2 53.2,21.6 53.6,21.6 53.6,22.2 53.2,22.6 51.2,22.6
GND on TOP: 50.79,0.5 7.21,0.5 0.5,7.21 0.5,50.79 7.21,57.5 50.79,57.5 57.5,50.79 57.5,7.21 ; 22 cut-outs
GND on BOTTOM: 50.79,0.5 7.21,0.5 0.5,7.21 0.5,50.79 7.21,57.5 50.79,57.5 57.5,50.79 57.5,7.21 ; 10 cut-outs

## Text on the board
Ref Des/Silkscreen Top: PLC2 | PLC1 | 485Tx | 485Rx | USM BOARD REV.P0-1
User.19: FIGURE | SIZE | 0.30 | 0.40 | 0.80 | 0.90 | 1.00 | 1.30 | 3.20 | DRILL CHART: TOP to BOTTOM | ALL UNITS ARE IN MILLIMETERS | PLATED | QTY | 289 | 10 | 3 | 2 | 6 | 4 | 5
